# Altium PCB POWR0001_BCR_LT1513.PcbDoc
Units mm, origin at the board's own origin, x right, y up, seen from the top; angles counter-clockwise.
Board outline 50 x 47.5 mm, 2 copper layers (Top Layer, Bottom Layer); 17 components, 10 nets, 48 pads, 4 vias.
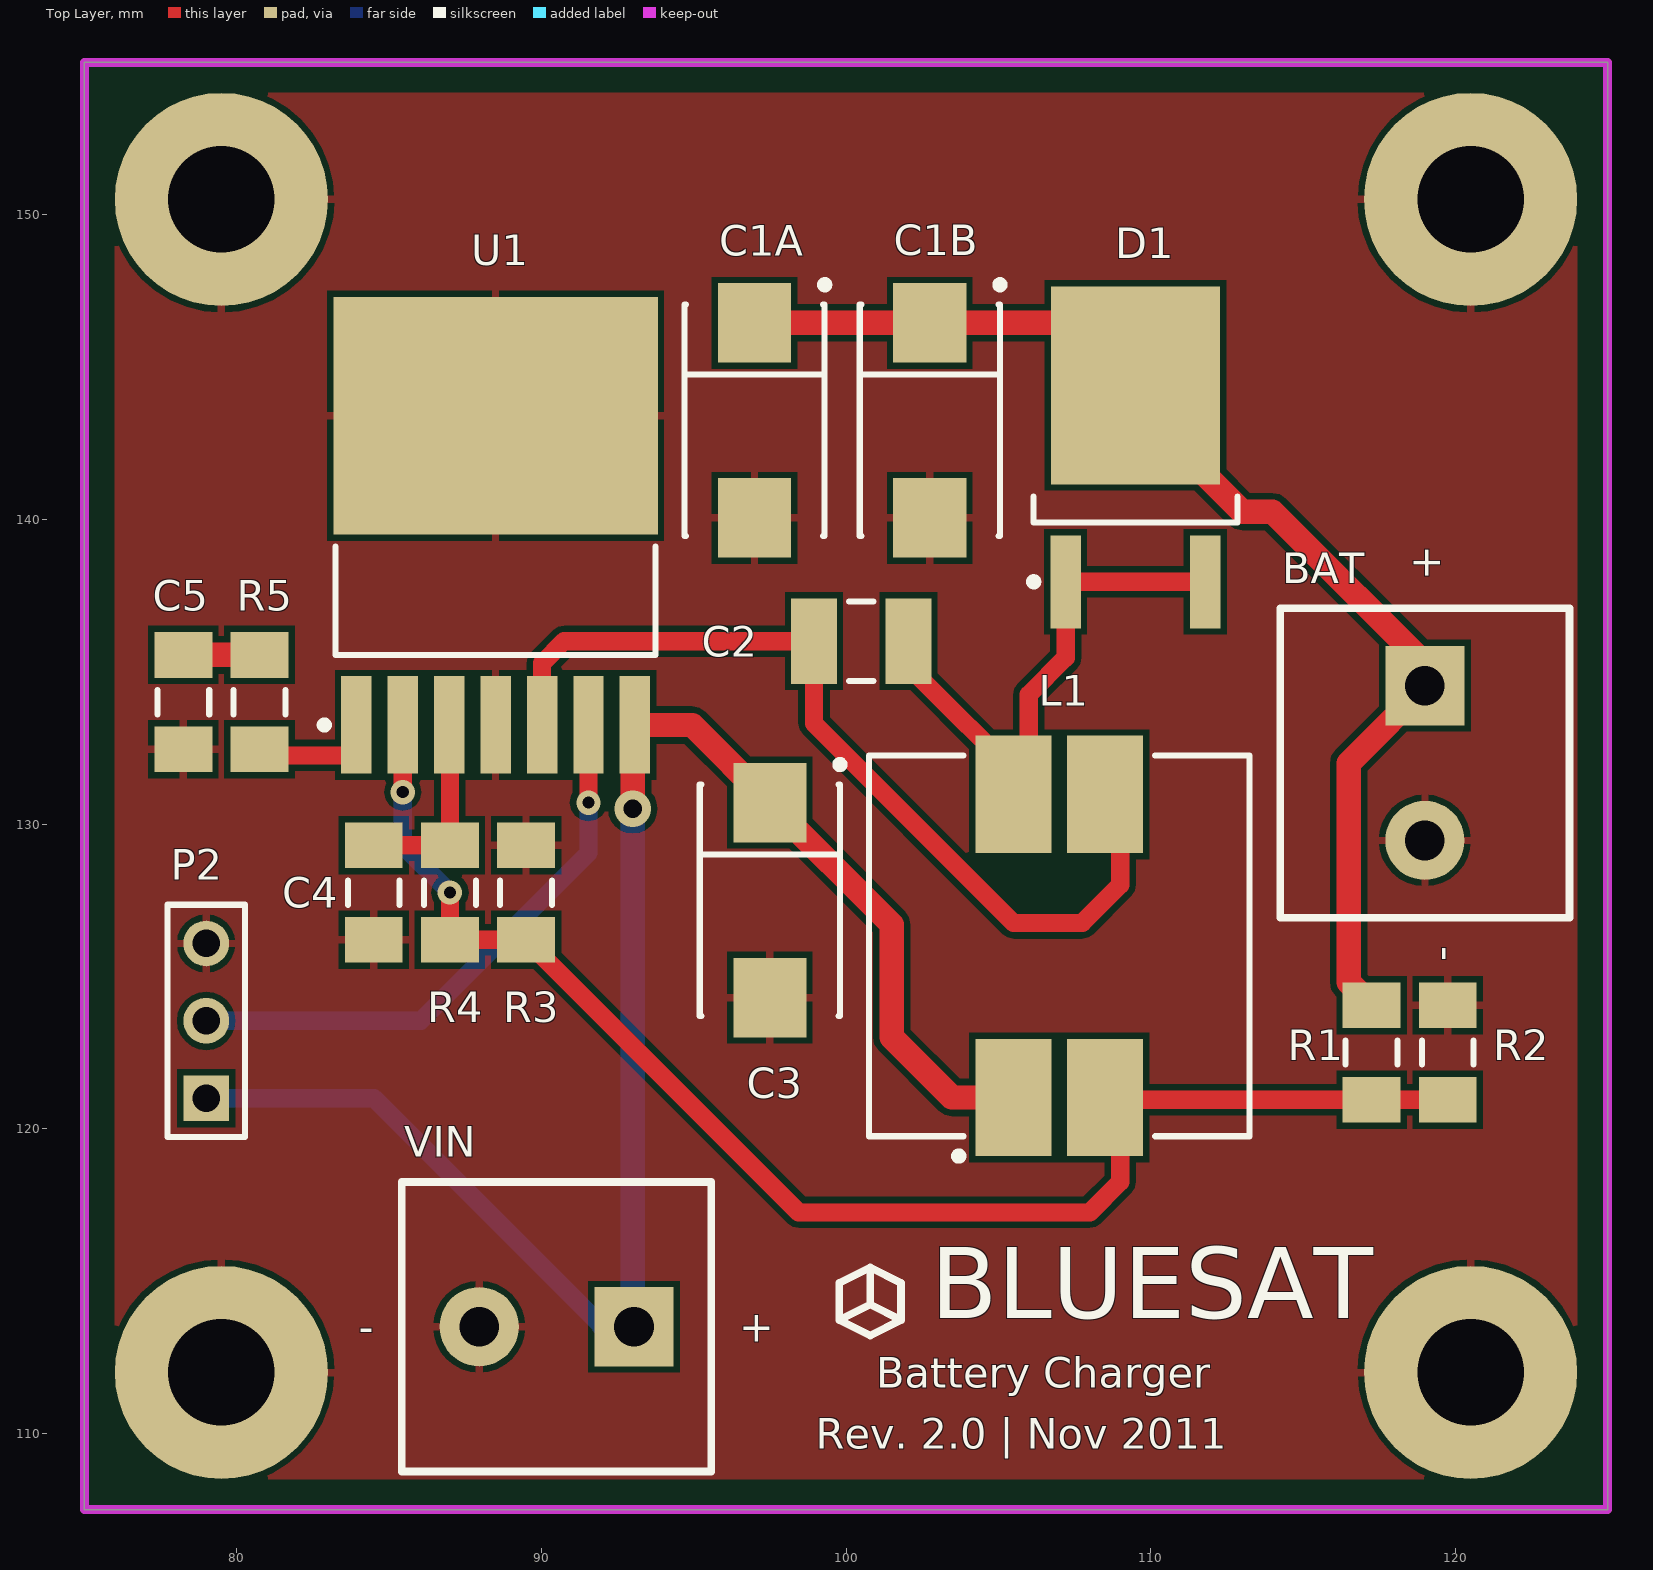
[diagram p0: Top Layer view]
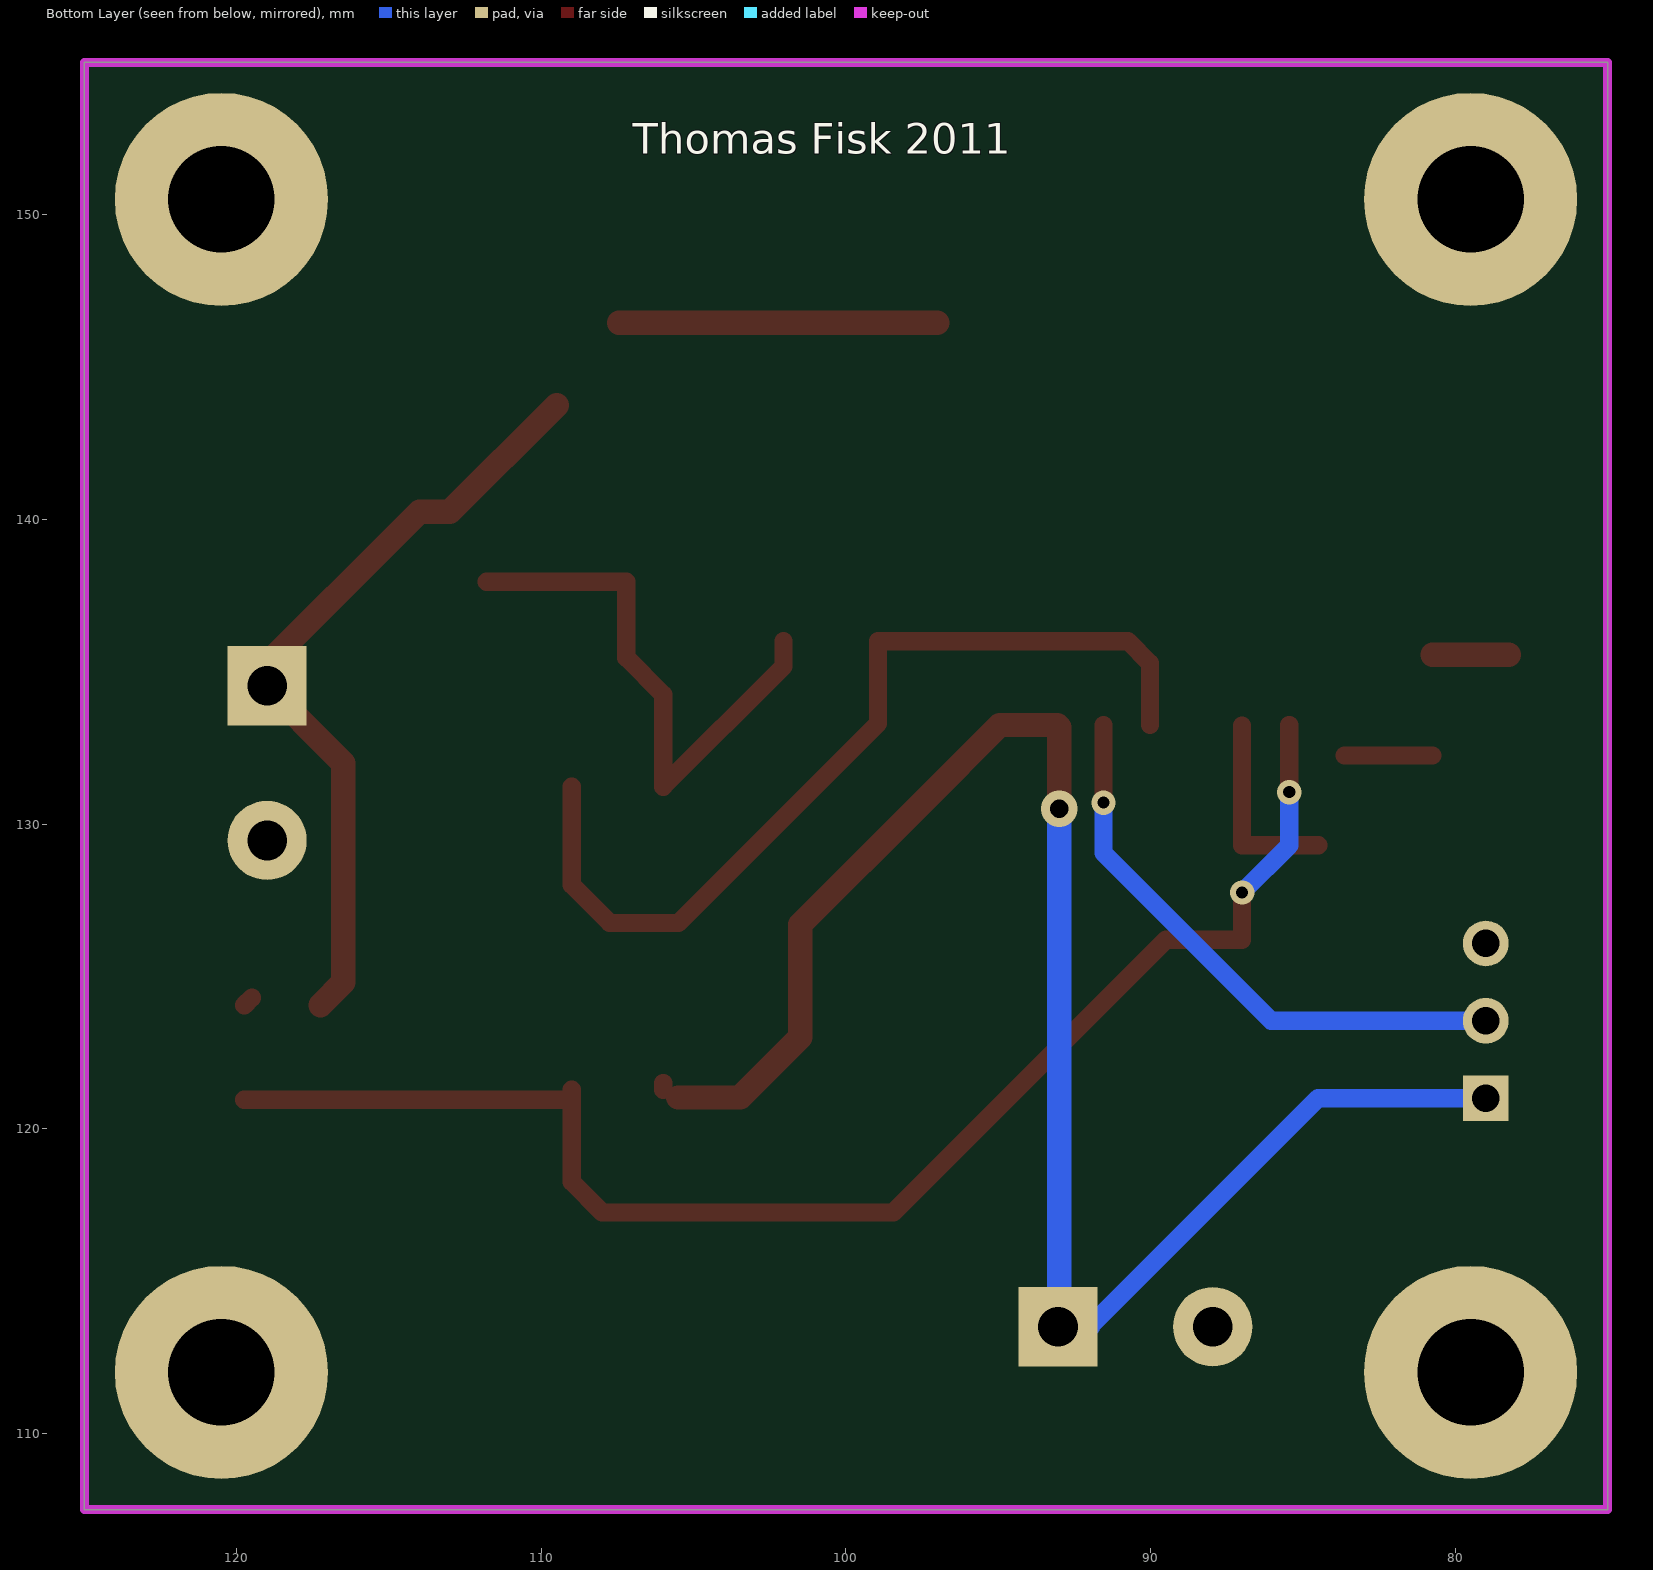
[diagram p1: Bottom Layer view, seen from below]

## Layer stack, top to bottom
Top Layer: signal copper 0.0356
Dielectric: dielectric 0.32, FR-4, Dk 4.8
Bottom Layer: signal copper 0.0356

## Board outline
75,155 125,155 125,107.5 75,107.5

## Design rules (kind name [scope] priority, off if disabled: settings)
Clearance [All] p1: gap=0.2
PolygonConnect [All] p1: connectstyle=Relief reliefconductorwidth=0.254 reliefentries=4 polygonreliefangle="90 Angle"
RoutingVias [All] p1: holewidth=0.3 width=0.5 viastyle="Through Hole" minholewidth=0.711 minwidth=1.27 maxholewidth=0.711 maxwidth=1.27
SilkscreenOverComponentPads [All] p1: minsilkscreentomaskgap=0.254
SolderMaskExpansion [All] p1: expansion=0.102
Width [All] p1: maxlimit=2 minlimit=0.2 preferedwidth=0.6 minimp=50.000000 maximp=50.000000 favimp=50.000000
27 further rules are at their usual default settings.

## Components (designator, comment, footprint, x,y, rotation, side; value= is the part's Value field where it differs from the comment)
BAT "Battery" "Screw Header 2" 119,132 r270 top
C1A "T495X" X 97,143.25 r270 top
C1B "T495X" X 102.75,143.25 r270 top
C2 "Cap" CAPC3225M 100.5,136 r180 top
C3 "T495X" X 97.5,127.5 r270 top
C4 "Cap" CAPC3216M 84.5,127.75 r270 top
C5 "Cap" CAPC3216M 78.25,134 r270 top
D1 "MBRD340G" TO229P990X238-3N 109.5,142 r90 top
L1 "DRQ125 Dual Inductor" DRQ125 107,126 r90 top
P2 "Header 3" HDR1X3 79,121 r90 top
R1 "Res1" RESC3216M 117.25,122.5 r90 top
R2 "Res1" RESC3216M 119.75,122.5 r270 top
R3 "Res1" RESC3216M 89.5,127.75 r270 top
R4 "Res1" RESC3216M 87,127.75 r90 top
R5 "Res1" RESC3216M 80.75,134 r90 top
U1 "LT1513" TO152P1396X238-8N 88.5,139.5 r90 top
VIN "Header 2" "Screw Header 2" 90.5,113.5 r180 top (schematic designator P1)

## Footprints (in the part's own frame and the unit in brackets; to place one, negate y for a bottom-side part, rotate by r counter-clockwise, add the part's x,y. Pads: shape width x height; smd on the part's side, far side on the other; paste and mask are expansions set on the pad)
CAPC3216M [mm] "Chip Capacitor, Body 3.2x1.6mm, IPC Low Density"
  rect 1.5x1.9 smd: 1(-1.55,0) 2(1.55,0)
  silkscreen extent -0.4,-0.85 0.4,0.85, body extent -1.7,-0.9 1.7,0.9, height 1.35
CAPC3225M [mm] "Chip Capacitor, Body 3.2x2.5mm, IPC Low Density"
  rect 1.5x2.8 smd: 1(-1.55,0) 2(1.55,0)
  silkscreen extent -0.4,-1.3 0.4,1.3, body extent -1.7,-1.35 1.7,1.35, height 1.35
DRQ125 [mm]
  rect 3.85x2.5 smd: 1(-4.975,1.5) 2(-4.975,-1.5) 3(4.975,-1.5) 4(4.975,1.5)
  silkscreen extent -7.02,-6.25 6.25,6.25, body extent -6.25,-6.25 6.25,6.25, height 6
HDR1X3 [mm] "Connector; Header; 3 Position"
  rect 1.5x1.5 hole 0.9: 1(0,0)
  round 1.5 hole 0.9: 2(2.54,0) 3(5.08,0)
  silkscreen extent -1.27,-1.27 6.35,1.27
RESC3216M [mm] "Chip Resistor, Body 3.2x1.6mm, IPC Low Density"
  rect 1.5x1.9 smd: 1(-1.55,0) 2(1.55,0)
  silkscreen extent -0.4,-0.85 0.4,0.85, body extent -1.68,-0.87 1.68,0.87, height 0.71
"Screw Header 2" [mm] "2 pin PCB screw header, 5.08 mm pin spacing"
  rect 2.6x2.6 hole 1.3: 1(-2.54,0)
  round 2.6 hole 1.3: 2(2.54,0)
  silkscreen extent -5.08,-4.75 5.08,4.75
TO152P1396X238-8N [mm] "D2-PAK, 8-Pads, Body 9.4x10.5mm (max), IPC Medium Density"
  rect 3.2x1 smd: 1(-6.25,4.572) 2(-6.25,3.048) 3(-6.25,1.524) 4(-6.25,0) 5(-6.25,-1.524) 6(-6.25,-3.048) 7(-6.25,-4.572)
  rect 7.8x10.65 smd: 4(3.9,0)
  silkscreen extent -6.37,-5.25 -0.4,5.75, body extent -3.95,-5.28 5.45,5.28, height 2.38
TO229P990X238-3N [mm] "D-PAK, 3-Pads, Body 6.2x6.7mm (max), IPC Medium Density"
  rect 3.05x1 smd: 1(-4.05,2.29) 3(-4.05,-2.29)
  rect 6.5x5.55 smd: 4(2.4,0)
  silkscreen extent -4.17,-3.35 -1.25,3.46, body extent -2.1,-3.37 4.12,3.37, height 2.38
X [mm] "Capacitor, SM Tantalum; Body 7.3 x 4.3 mm (LxW typ)"
  rect 2.6x2.4 smd: 1(-3.2,0) 2(3.2,0)
  silkscreen extent -4.57,-2.3 3.8,2.43

## Part data
BAT: "Multicell Battery"
C1A C1B C3: "Solid Tantalum Chip Capacitor, Standard T495 Series - Low ESR, Surge Robust"
C2 C4 C5: "Capacitor"
D1: library part "Diode 11DQ03", "Schottky Rectifier"
P2: "Header, 3-Pin"
R1 R2 R3 R4 R5: "Resistor"
VIN: "Header, 2-Pin"

## Free pads (board coordinates)
  round 7 hole 3.5: 0(79.5,112) 0(79.5,150.5) 0(120.5,112) 0(120.5,150.5)

## Via types
v1: diameter 0.8, hole 0.4, Top Layer to Bottom Layer, 3 vias
v2: diameter 1.2, hole 0.6, Top Layer to Bottom Layer, 1 vias

## Nets (pads, with @x,y where several pads share a name; then routed paths per layer and width w, separated by ;. In a path a pad name is that pad's centre, name@x,y a point inside that pad or via, vN(x,y) a via of type N, cw(c..) or ccw(c..) an arc to the next point about the centre after c; other vN are vias at no path point)
GND: BAT.2 C1A.2 C1B.2 C3.2 C4.2 C5.2 P2.3 pad.0 R2.1 R3.1 U1.4 VIN.2 | length 0.4
  Top Layer w0.6: R2.1@119.5,124.3 R2.1
NetBAT_1: BAT.1 C1A.1 C1B.1 D1.4 R1.2 | length 36.6
  Top Layer w0.6: BAT.1@119.25,134.75 BAT.1@119.5,134.75
  Top Layer w0.8: C1A.1 C1B.1 D1.4@107.45,146.45 ; D1.4@109.5,143.75 113,140.25 114,140.25 BAT.1@119.5,134.75 ; R1.2 116.5,124.8 116.5,132 BAT.1@119.25,134.75
NetC2_1: C2.1 D1.1 D1.3 L1.4 | length 18.2
  Top Layer w0.6: C2.1 102.05,135.175 106,131.225 106,134.25 107.21,135.46 D1.1 D1.3
NetC2_2: C2.2 L1.3 U1.5 | length 30.5
  Top Layer w0.6: U1.5 90.024,135.274 90.75,136 C2.2 98.95,133.3 105.5,126.75 107.75,126.75 109,128 L1.3@109,131.225
NetC4_1: C4.1 R4.2 U1.3 | length 6.5
  Top Layer w0.254: R4.2@86.976,129.324 R4.2
  Top Layer w0.6: C4.1 R4.2 U1.3@87,133.226
NetC5_1: C5.1 R5.2 | length 2.5
  Top Layer w0.8: C5.1 R5.2
NetL1_2: L1.2 R1.1 R2.2 R3.2 R4.1 U1.2 | length 47.3
  Top Layer w0.6: v1(85.452,131.048) U1.2 ; v1(87,127.75) R4.1 R3.2 98.45,117.25 108,117.25 109,118.25 L1.2@109,121.275 ; L1.2@109.325,120.95 R1.1 R2.2
  Bottom Layer w0.6: v1(85.452,131.048) 85.452,129.298 v1(87,127.75)
NetR5_1: R5.1 U1.1 | length 2.9
  Top Layer w0.6: R5.1@80.75,132.25 U1.1@83.628,132.25
SHUTDOWN: P2.2 U1.6 | length 19
  Top Layer w0.6: v1(91.548,130.702) U1.6
  Bottom Layer w0.6: P2.2 86.04,123.54 91.548,129.048 v1(91.548,130.702)
VIN: C3.1 L1.1 P2.1 U1.7 VIN.1 | length 57.7
  Top Layer w0.6: L1.1@106,121.275 L1.1@106,121.5
  Top Layer w0.8: v2(93,130.5) U1.7@93,133.178 ; U1.7 94.95,133.25 C3.1 101.5,126.7 101.5,123 103.475,121.025 L1.1
  Bottom Layer w0.6: P2.1 84.5,121 92,113.5 VIN.1
  Bottom Layer w0.8: VIN.1@92.08,113.5 92.04,113.54 93,113.54 v2(93,130.5)

## Polygon pours and split planes (outlines as drawn)
GND on Top Layer "Top Layer-No Net" (solid, remove dead copper, pour order 4): 76,108.5 124,108.5 124,154 76,154

## Keep-outs
Keep-Out Layer:
  the board outline again, w0.3

## Silkscreen, mask and mechanical layers (free items; w line width, h text height)
Top Overlay:
  lines w0.254: 99.776,113.716 100.792,113.208 101.808,113.716 ; 99.776,113.716 99.776,114.934 100.792,115.442 ; 99.776,113.716 100.792,114.224 ; 100.792,114.224 100.792,115.442 ; 100.792,114.224 101.808,113.716 ; 100.792,115.442 101.808,114.934 101.808,113.716
  text "+" at 119.5,138 h1 r90
  text "-" at 120,125.5 h1 r90
  text "-" at 84,113 h1
  text "+" at 96.5,113 h1
  text "BLUESAT" at 102.78,113.008 h4
  text "Battery Charger" at 101,111.5 h1
  text "Rev. 2.0 | Nov 2011" at 99,109.5 h1
Bottom Overlay:
  text "Thomas Fisk 2011" at 107,152 h1